# EAGLE board Electrical Design file of Light Sensitive Sensor (EAGLE 9.7.0)

Size 142.48 x 98.42 mm. Coordinates in mm from the lower left corner, seen from the top.
Outline: 0,0 142.48,0 142.48,98.42 0,98.42 0,0
Copper layers (1*16): Top 0.035mm / dielectric 1.5mm / Bottom 0.035mm
Design rules "default": minimum track width 6mil, minimum drill 0.35mm, track to track 6mil, track to pad 6mil, pad to pad 6mil, via to via 6mil, smd to smd 6mil, copper to edge 40mil, drill to drill 6mil, minimum pad ring 10mil, minimum via ring 8mil, stop-mask expansion 4mil, vias tented up to drill 0mil, thermal gap 10mil

## Footprints (pad centres in the part's own frame; a part is rotated, then mirrored left to right if it is on the bottom)
1X02 = drill 1.016 long: 1 -1.27,0; 2 1.27,0
GL5528 = drill 0.8 pad 1.4: 1 -1.702,0; 2 1.702,0
RESAD1016W63L850D250B = drill 0.83 pad 1.43: 1 -5.08,0; 2 5.08,0
ARDUINO-UNO-R3-SHIELD = drill 1.016 pad 1.88: 3.3V 24.13,-2.54; 5V 24.13,0; A0 24.13,12.7; A1 24.13,15.24; A2 24.13,17.78; A3 24.13,20.32; A4 24.13,22.86; A5 24.13,25.4; AREF -24.13,-13.97; D2 -24.13,20.32; D3 -24.13,17.78; D4 -24.13,15.24; D5 -24.13,12.7; D6 -24.13,10.16; D7 -24.13,7.62; D8 -24.13,3.81; D9 -24.13,1.27; D10 -24.13,-1.27; D11 -24.13,-3.81; D12 -24.13,-6.35; D13 -24.13,-8.89; GND@0 24.13,2.54; GND@1 24.13,5.08; GND@2 -24.13,-11.43; IOREF 24.13,-7.62; NC 24.13,-10.16; RES 24.13,-5.08; RX -24.13,25.4; SCL -24.13,-19.05; SDA -24.13,-16.51; TX -24.13,22.86; VIN 24.13,7.62

## Placement (x,y rotation side)
L1  LIGHTBULB  [1X02]  136.76,88.84 0 top
R1  PHOTOCELL_GL5528  [GL5528]  106.8,91.44 0 top
R2  1k  [RESAD1016W63L850D250B]  73.46,91.58 0 top
R3  1k  [RESAD1016W63L850D250B]  123.52,62.23 0 top
U1  ARDUINO-UNO-R3-SHIELD  [ARDUINO-UNO-R3-SHIELD]  47.88,29.84 270 top

## Library data of the parts
L1 R1-R3 U1 = Tinkercad

## Nets
L1_1: L1.1 R3.2
U1_5V: R1.2 U1.5V
U1_A3: R1.1 R2.2 U1.A3
U1_D7: R3.1 U1.D7
U1_GND: L1.2 R2.1 U1.GND@0 U1.GND@1 U1.GND@2

## Tracks (layer width: path | path; a pad name or v marks a point on that pad's centre or on a via)
L1_1  (1 unrouted)
U1_5V  (1 unrouted)
U1_A3  (2 unrouted)
U1_D7  (1 unrouted)
U1_GND  (4 unrouted)